# Altium PCB RPI 3.PcbDoc
Units mil, origin at the board's own origin, x right, y up, seen from the top; angles counter-clockwise.
Board outline 3139.76 x 2874.02 mil, 2 copper layers (Top Layer, Bottom Layer), stack 61.2 mil thick; 29 components, 46 nets, 139 pads, 1 vias.
Unrouted connection lines stored in the file: 63.
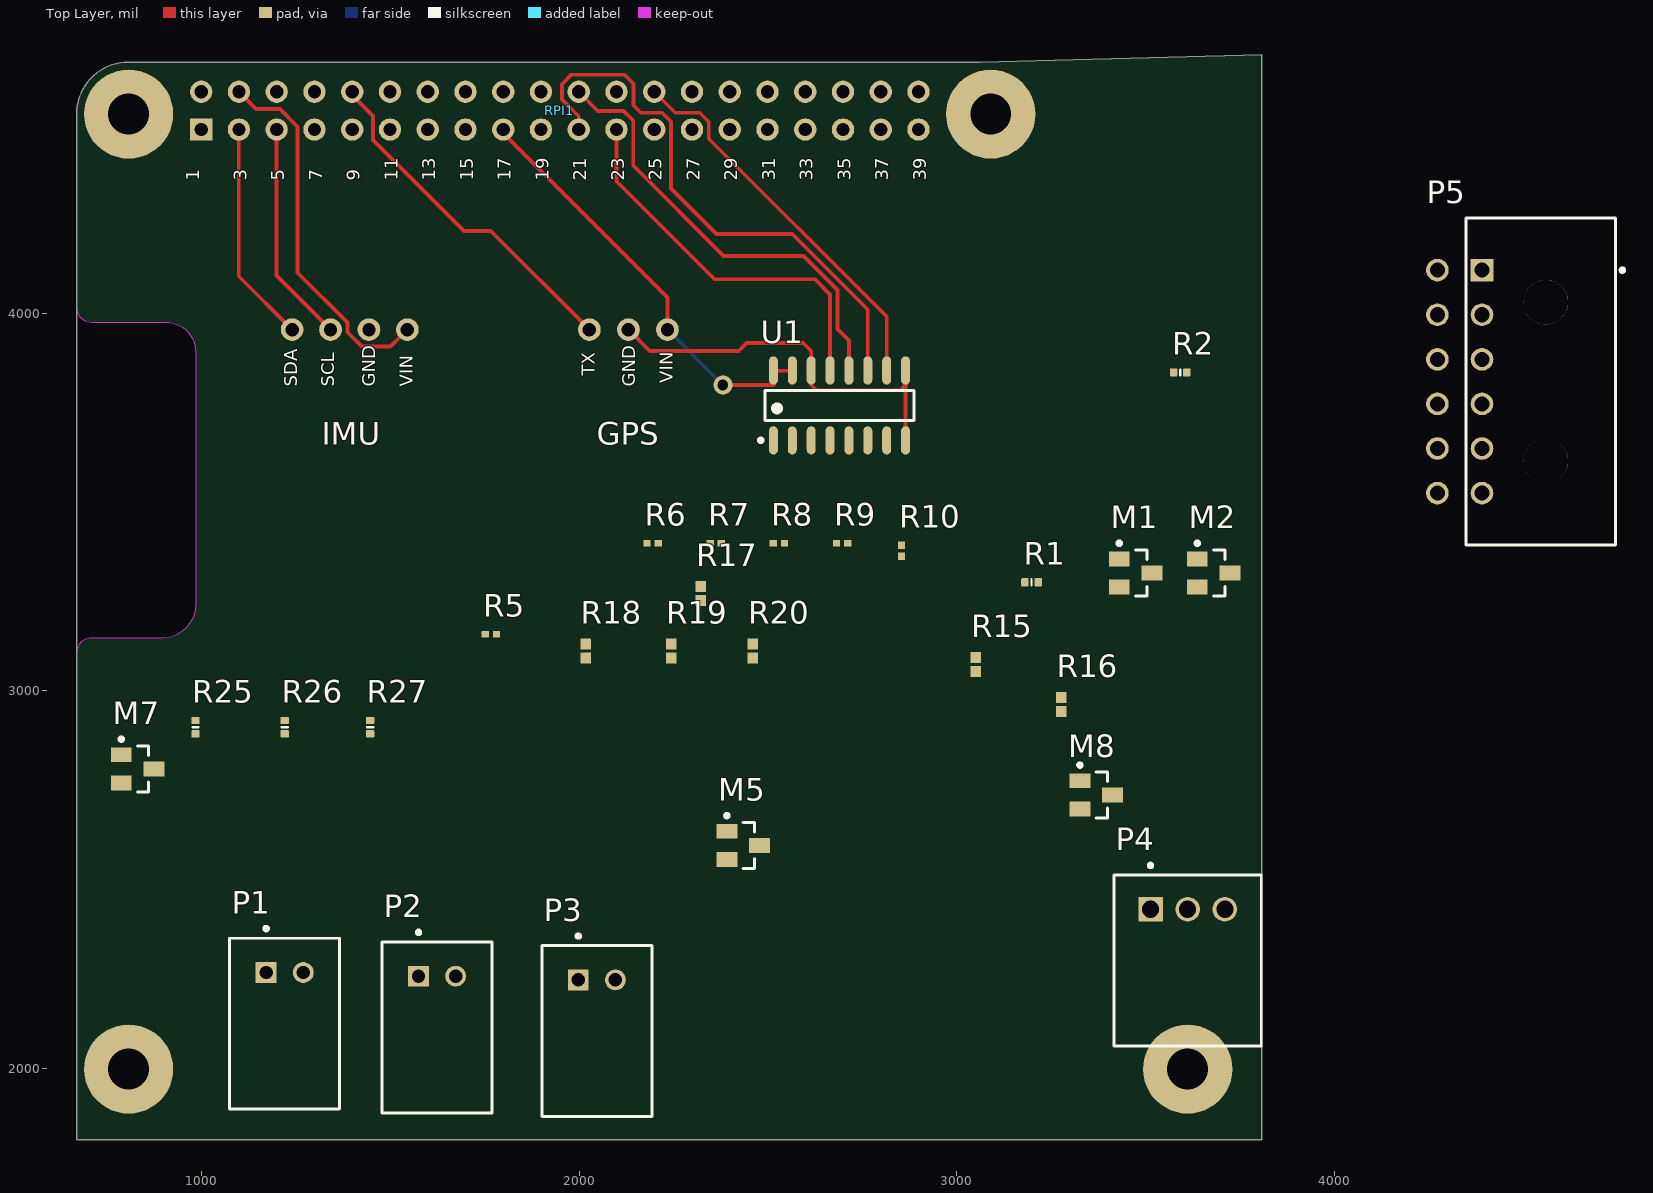
[diagram p0: Top Layer view]
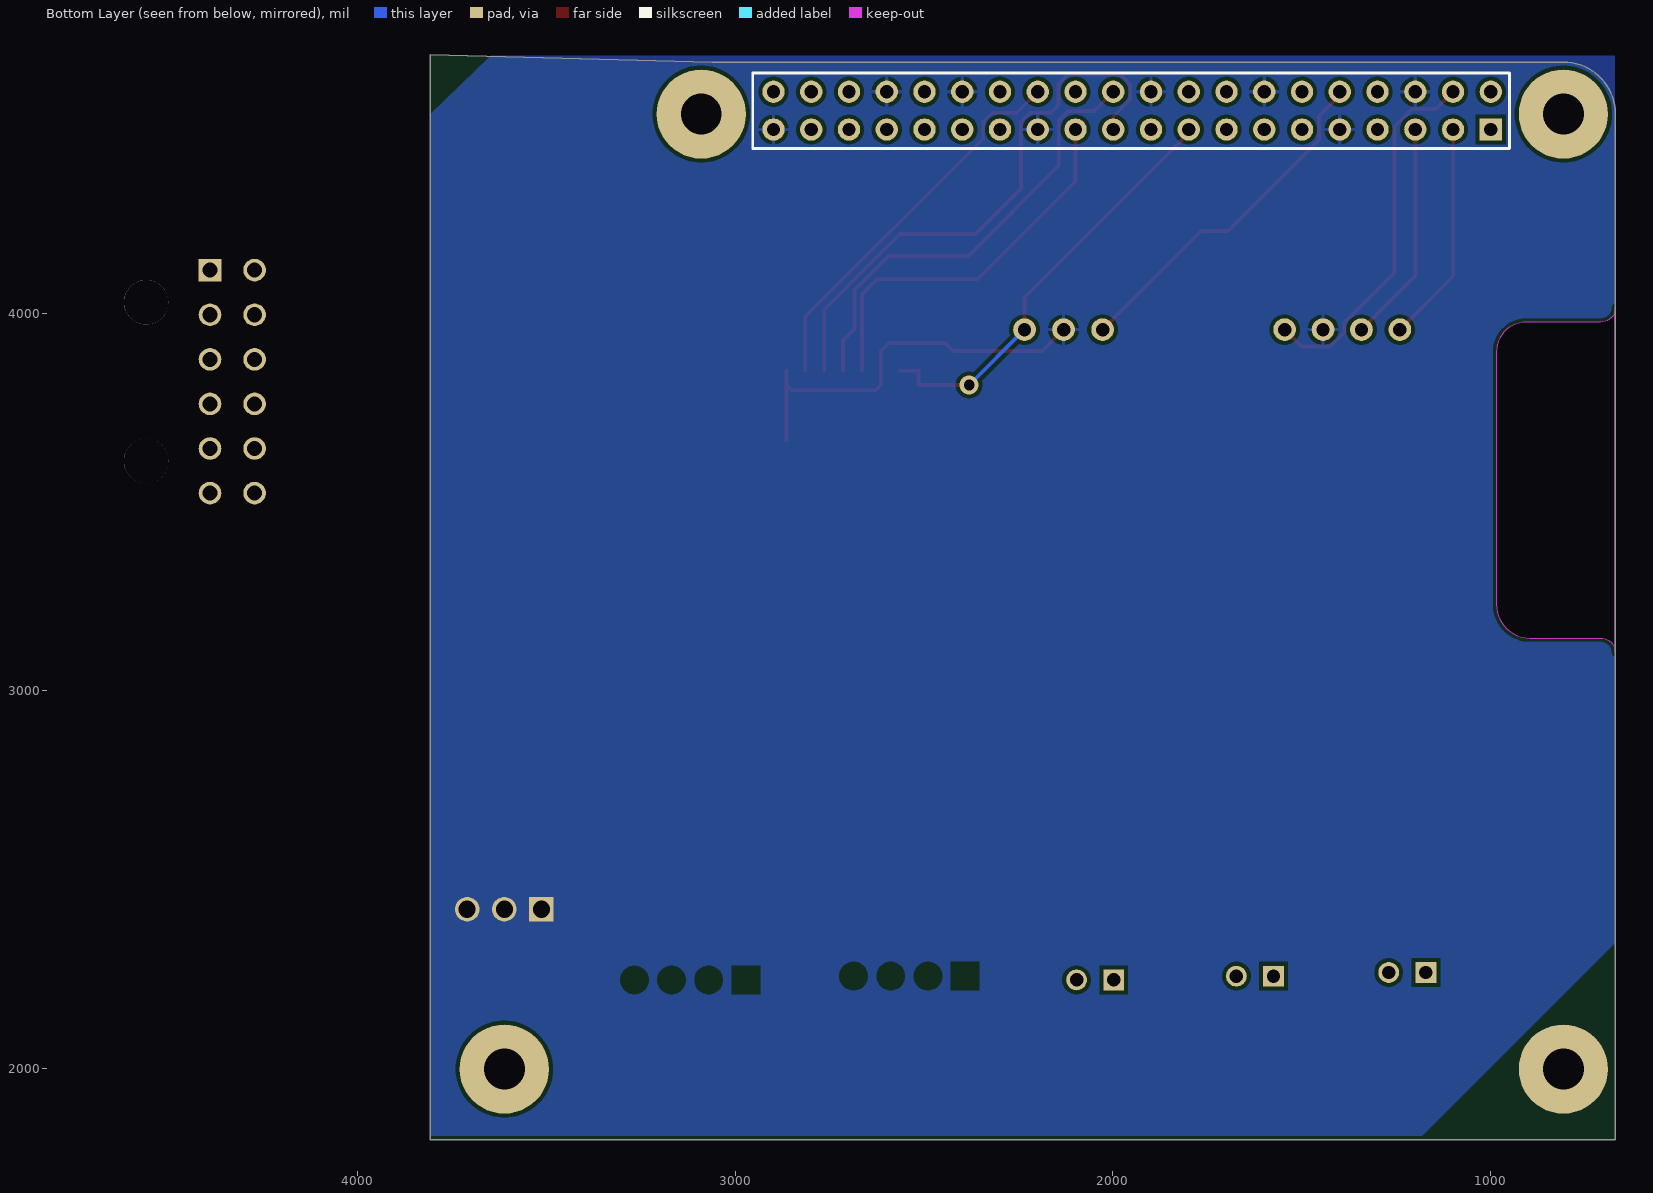
[diagram p1: Bottom Layer view, seen from below]

## Layer stack, top to bottom
Top Solder: solder mask 0.8, Solder Resist, Dk 3.5
Top Layer: signal copper 2.1
Dielectric 1: dielectric 57, FR-4, Dk 4.6
Bottom Layer: signal copper 2.1
Bottom Solder: solder mask 0.8, Solder Resist, Dk 3.5

## Board outline
3257.87,1811.02 3809.06,1811.02 3809.06,4685.04 3061.02,4665.35 807.09,4665.35 ccw(c807.08,4527.56) 669.29,4527.56 669.29,2598.43 ccw(c807.11,2598.42) 669.53,2590.33 669.29,2590.1 669.29,1811.02
cut-out: 669.29,3100.39 669.29,4015.75 ccw(c708.66,4015.75) 708.66,3976.38 905.51,3976.38 cw(c905.51,3897.64) 984.25,3897.64 984.25,3228.35 cw(c895.67,3228.34) 895.67,3139.76 708.66,3139.76 ccw(c708.66,3100.4)

## Design rules (kind name [scope] priority, off if disabled: settings)
Clearance [All] p1: gap=10 ignorepadtopadclearanceinfootprint=FALSE except(0: Arc-Hole Track-Hole SMDPad-Hole THPad-Hole Via-Hole Fill-Hole Poly-Hole Region-Hole Text-Hole)
PolygonConnect [All] p1: connectstyle=Relief reliefconductorwidth=10 reliefentries=4 polygonreliefangle="90 Angle" airgapwidth=10
RoutingVias [All] p1: holewidth=28 width=50 viastyle="Through Hole" minholewidth=28 minwidth=50 maxholewidth=28 maxwidth=50
SolderMaskExpansion [All] p1: expansion=4 istentingtop=FALSE
Width [All] p1: maxlimit=10 minlimit=10 preferedwidth=10
30 further rules are at their usual default settings.

## Components (designator, comment, footprint, x,y, rotation, side; value= is the part's Value field where it differs from the comment)
M1 "BSS138" FAIR-SOT23-3_V 3474.4,3312.01 r0 top
M2 "BSS138" FAIR-SOT23-3_V 3681.1,3312.01 r0 top
M5 "BSS138" FAIR-SOT23-3_V 2435.04,2590.55 r0 top
M7 "BSS138" FAIR-SOT23-3_V 830.71,2793.31 r0 top
M8 "BSS138" FAIR-SOT23-3_V 3370.08,2724.41 r0 top
P1 "S2B-XH-A(LF)(SN)" JST-S2B-XH-A(LF)(SN)_V 1220.47,2253.94 r0 top
P2 "S2B-XH-A(LF)(SN)" JST-S2B-XH-A(LF)(SN)_V 1624.01,2244.09 r0 top
P3 "S2B-XH-A(LF)(SN)" JST-S2B-XH-A(LF)(SN)_V 2047.24,2234.25 r0 top
P4 "S3B-XH-A(LF)(SN)" JST-S3B-XH-A(LF)(SN)_V 3612.2,2421.26 r0 top
P5 "66201221022" 66201221022 4547.24,3818.9 r90 top
R1 "Resistor 10K  +/-1 % 0402 63 mW" RESC0402(1005)_L 3198.82,3287.4 r0 top value=10k
R2 "Resistor 10K  +/-1 % 0402 63 mW" RESC0402(1005)_L 3592.51,3843.5 r0 top value=10k
R5 "RES" RESC1005X40X25LL05T10 1766.73,3149.61 r0 top
R6 "RES" RESC1005X40X25LL05T10 2194.88,3390.75 r0 top
R7 "RES" RESC1005X40X25LL05T10 2362.2,3390.75 r0 top
R8 "RES" RESC1005X40X25LL05T10 2529.52,3390.75 r0 top
R9 "RES" RESC1005X40X25LL05T10 2696.85,3390.75 r0 top
R10 "RES" RESC1005X40X25LL05T10 2854.33,3371.06 r90 top
R15 "RES-2" RESC1005X40X25ML10T10 3051.18,3069.88 r90 top value=33k
R16 "RES-2" RESC1005X40X25ML10T10 3277.56,2963.58 r90 top value=33k
R17 "RES-2" RESC1005X40X25ML10T10 2322.83,3257.87 r90 top value=33k
R18 "RES-2" RESC1005X40X25ML10T10 2017.72,3105.32 r90 top value=33k
R19 "RES-2" RESC1005X40X25ML10T10 2244.1,3105.32 r90 top value=33k
R20 "RES-2" RESC1005X40X25ML10T10 2460.63,3105.32 r90 top value=33k
R25 "Resistor 10K  +/-1 % 0402 63 mW" RESC0402(1005)_L 984.24,2903.54 r90 top value=10k
R26 "Resistor 10K  +/-1 % 0402 63 mW" RESC0402(1005)_L 1220.46,2903.54 r90 top value=10k
R27 "Resistor 10K  +/-1 % 0402 63 mW" RESC0402(1005)_L 1446.84,2903.54 r90 top value=10k
RPI1 "RPI GPIO Connector" RPI 1949.21,4536.61 r180 top
U1 "MCP3008-I/SL" SOIC-SL16_L 2689.96,3755.91 r90 top

## Footprints (in the part's own frame and the unit in brackets; to place one, negate y for a bottom-side part, rotate by r counter-clockwise, add the part's x,y. Pads: shape width x height; smd on the part's side, far side on the other; paste and mask are expansions set on the pad)
66201221022 [mm] "Dual row Right angle header With plastic peg 12p"
  rect 1.52x1.52 hole 1.02: 1(7.5,3.95)
  round 1.52 hole 1.02: 2(4.5,3.95) 3(1.5,3.95) 4(-1.5,3.95) 5(-4.5,3.95) 6(-7.5,3.95) 7(7.5,6.95) 8(4.5,6.95) 9(1.5,6.95) 10(-1.5,6.95) 11(-4.5,6.95) 12(-7.5,6.95)
  round 3 hole 3 unplated: MH1(-5.34,-0.35) MH2(5.34,-0.35)
  silkscreen extent -11,-5.62 11,5.02, body extent -10.85,-4.95 10.85,7.27, height 8.79
FAIR-SOT23-3_V [mm] "SOT23, 3-Leads, Body 3.12x1.5mm, Pitch 0.95mm"
  rect 1.4x1 smd: 1(-1.1,0.95) 2(-1.1,-0.95) 3(1.1,0)
  silkscreen extent -1.22,-1.55 0.75,2.12, body extent -1.35,-1.56 1.35,1.56, height 1.2
JST-S2B-XH-A(LF)(SN)_V [mm] "Header, 2-Leads, Body 7.4x11.5mm, Pitch 2.5mm"
  rect 1.4x1.4 hole 0.9: 1(-1.25,0)
  round 1.4 hole 0.9: 2(1.25,0)
  silkscreen extent -3.7,-9.2 3.7,3.08, body extent -3.7,-9.2 3.7,2.3, height 5.95
JST-S3B-XH-A(LF)(SN)_V [mm] "Header, 3-Leads, Body 9.9x11.5mm, Pitch 2.5mm"
  rect 1.65x1.65 hole 1.15: 1(-2.5,0)
  round 1.65 hole 1.15: 2(0,0) 3(2.5,0)
  silkscreen extent -4.95,-9.2 4.95,3.08, body extent -4.95,-9.2 4.95,2.3, height 6.15
RESC0402(1005)_L [mm] "Chip Resistor, Body 1.0x0.5mm, IPC High Density"
  rrect25% 0.5x0.55 smd: 1(-0.45,0) 2(0.45,0)
  silkscreen extent 0,-0.2 0,0.2, body extent -0.5,-0.25 0.5,0.25, height 0.3
RESC1005X40X25LL05T10 [mm] "Chip Resistor, 2-Leads, Body 1.00x0.50mm, IPC High Density"
  rect 0.5x0.45 smd: 1(-0.375,0) 2(0.375,0)
  body extent -0.53,-0.27 0.53,0.28, height 0.4
RESC1005X40X25ML10T10 [mm] "Chip Resistor, 2-Leads, Body 1.1x0.6mm, IPC Low Density"
  rect 0.75x0.7 smd: 1(-0.475,0) 2(0.475,0)
  body extent -0.55,-0.27 0.55,0.28, height 0.4
RPI [mm]
  rect 1.5x1.5 hole 0.9: 1(24.13,1.27)
  round 1.5 hole 0.9: 2(24.13,-1.27) 3(21.59,1.27) 4(21.59,-1.27) 5(19.05,1.27) 6(19.05,-1.27) 7(16.51,1.27) 8(16.51,-1.27) 9(13.97,1.27) 10(13.97,-1.27) 11(11.43,1.27) 12(11.43,-1.27) 13(8.89,1.27) 14(8.89,-1.27) 15(6.35,1.27) 16(6.35,-1.27) 17(3.81,1.27) 18(3.81,-1.27) 19(1.27,1.27) 20(1.27,-1.27) 21(-1.27,1.27) 22(-1.27,-1.27) 23(-3.81,1.27) 24(-3.81,-1.27) 25(-6.35,1.27) 26(-6.35,-1.27) 27(-8.89,1.27) 28(-8.89,-1.27) 29(-11.43,1.27) 30(-11.43,-1.27) 31(-13.97,1.27) 32(-13.97,-1.27) 33(-16.51,1.27) 34(-16.51,-1.27) 35(-19.05,1.27) 36(-19.05,-1.27) 37(-21.59,1.27) 38(-21.59,-1.27) 39(-24.13,1.27) 40(-24.13,-1.27)
  body extent -25.52,-2.63 25.53,2.38, height 8.5
SOIC-SL16_L [mm] "SOIC, 16-Leads, Body 9.9x3.9mm, Pitch 1.27mm, IPC High Density"
  oval 1.9x0.6 smd: 1(-2.35,4.445) 2(-2.35,3.175) 3(-2.35,1.905) 4(-2.35,0.635) 5(-2.35,-0.635) 6(-2.35,-1.905) 7(-2.35,-3.175) 8(-2.35,-4.445) 9(2.35,-4.445) 10(2.35,-3.175) 11(2.35,-1.905) 12(2.35,-0.635) 13(2.35,0.635) 14(2.35,1.905) 15(2.35,3.175) 16(2.35,4.445)
  silkscreen extent -2.47,-5 1,5.42, body extent -2,-5 2,5, height 1.75

## Part data
M1 M2 M5 M7 M8: library part CMP-013-00021-4, "N-Channel Logic Level Enhancement Mode Field Effect Transistor, 220 mA, 50 V, -55 to 150 degC, 3-Pin SOT-23, RoHS, Tape and Reel", Case/Package=TO-236-3, Input Capacitance=27pF, Manufacturer=Fairchild, Max Operating Temperature=150°C, Min Operating Temperature=-55°C, Nominal Dual Supply Voltage=50V, Package Description="3-Pin Small Outline Transistor, Body 2.92 x 1.325 mm, Pitch 0.95 mm", Package Quantity=1, Package Reference=SOT23-3, Package Version="Rev. 12, 03/2016", Power=360mW, Resistance=0.7Ohm, Datasheet URL=https://www.fairchildsemi.com/datasheets/BS/BSS138.pdf, Datasheet Version="Rev. C, 10/2005", Elements=1, Mounting Technology=SM, Nominal Vgs=1.3V, Packaging=TapeandReel, Pins=3, Rds On Max=3.5Ohm, RoHS Compliant=True, Typical Rise Time=9ns
P1 P2 P3: library part CMP-002-00032-2, "Male Header, Pitch 2.5 mm, 1 x 2 Position, Height 6.1 mm, Tail Length 3.4 mm, -25 to 85 degC, RoHS, Bulk", Manufacturer=JST, Max Operating Temperature=85°C, Min Operating Temperature=-25°C, Package Description="XH Series Disconnectable Crimp Style Connector, Pitch 2.5 mm, 1 x 2 Position, Height 6.1 mm, Tail Length 3.4 mm", Case/Package=S2B-XH-A(LF)(SN), Connector Type=Header, Datasheet URL=http://www.jst-mfg.com/product/pdf/eng/eXH.pdf, Datasheet Version=May-16, Gender=Male, Manufacturer URL=http://www.jst.com/home2.html, Mounting Technology=TH, Package Reference=S2B-XH-A(LF)(SN), RoHS Compliant=Unknown
P4: library part CMP-002-00033-2, "Male Header, Pitch 2.5 mm, 1 x 3 Position, Height 6.1 mm, Tail Length 3.4 mm, -25 to 85 degC, RoHS, Bulk", Manufacturer=JST, Max Operating Temperature=85°C, Min Operating Temperature=-25°C, Package Description="Male Header, Pitch 2.5 mm, 1 x 3 Position, Height 6.1 mm, Tail Length 3.4 mm", Case/Package=S3B-XH-A(LF)(SN), Connector Type=Header, Datasheet URL=http://www.jst-mfg.com/product/pdf/eng/eXH.pdf, Datasheet Version=May-16, Gender=Male, Manufacturer URL=http://www.jst.com/home2.html, Mounting Technology=TH, Package Reference=S3B-XH-A(LF)(SN), RoHS Compliant=Unknown
P5: library part CMP-002-00072-1, "THT Male Header WR-MPC3, with Snap-in Plastic Pegs, Right Angled, Dual Row, pitch 3 mm, 12 pins"
R1 R2 R25 R26 R27: library part CMP-009-00149-3, "Chip Resistor, 10 kOhms, +/-1 %, 63 mW, -55 to 125 degC, 0402", Case/Package=0402, Max Operating Temperature=155°C, Min Operating Temperature=-55°C, Power=63mW, Tolerance=1%, Pins=2
R5 R6 R7 R8 R9 R10: library part CMP-009-00177-1, "Res General Purpose Thick Film 0402 18k Ohm 5% 1/16W ±100ppm/°C Molded Paper T/R"
R15 R16 R17 R18 R19 R20: library part CMP-009-00028-5, "Chip Resistor, 33 KOhm, +/- 5%, 0.063 W, -55 to 155 degC, 0402 (1005 Metric)", Case/Package=0402, Max Operating Temperature=155°C, Min Operating Temperature=-55°C, Power=63mW, Tolerance=5%, Mounting Technology=SM, Pins=2, RoHS Compliant=True
RPI1: library part "rpi connector", "GPIO Header for Raspberry Pi A+/B+/Pi 2/Pi 3 - 2x20", Manufacturer="SparkFun Electronics", Manufacturer Part Number=PRT-14017, Supplier Part Number 1=1568-1462-ND, Accessory Type=Connector, Category="Development Boards, Kits, Programmers", ComponentLink1Description=https://cdn.sparkfun.com/datasheets/Dev/RaspberryPi/12313.pdf, ComponentLink1URL=https://cdn.sparkfun.com/datasheets/Dev/RaspberryPi/12313.pdf, For Use With/Related Products="Raspberry Pi", Nils Minor=author, nilsminor@web.de=mail, Part Status=Active, Pricing 1="1=1.84 (EUR)", RoHS="RoHS Compliant", Stock 1=150, Supplier 1=Digi-Key
U1: library part CMP-0188-00041-2, "2.7V 4-Channel/8-Channel 10-Bit A/D Converters with SPI Serial Interface, 16-Pin SOIC 150mil, Industrial Temperature", Code_IPC=SOIC127P600-16, Code_JEDEC=MS-012-AC, ComponentLink1Description="Manufacturer URL", ComponentLink1URL=http://www.microchip.com/, ComponentLink2Description=Datasheet, ComponentLink2URL=http://ww1.microchip.com/downloads/en/DeviceDoc/21295d.pdf, ComponentLink3Description="Package Specification", ComponentLink3URL=http://www.microchip.com/stellent/groups/techpub_sg/documents/packagingspec/en012702.pdf, DatasheetVersion="revD, Dec-2008", PackageDescription="16-Lead Plastic Small Outline (SL) - Narrow, 3.90mm Body [SOIC]", PackageReference=SOIC-SL16, PackageVersion="revBB, Aug-2009", RevisionNote="URLs added."

## Free pads (board coordinates)
  round 60 hole 35.43: 20(1341.86,3956.69) 21(1240.16,3956.69) 21(1443.57,3956.69) 22(1545.28,3956.69) 24(2027.56,3956.69) 25(2130.91,3956.69) 26(2234.25,3956.69)
  round 236.22 hole 108.27: ""(807.09,1998.03) ""(807.09,4527.56) ""(3090.55,4527.56) ""(3612.2,1998.03)

## Via types
v1: diameter 50, hole 28, Top Layer to Bottom Layer, 1 vias

## Nets (pads, with @x,y where several pads share a name; then routed paths per layer and width w, separated by ;. In a path a pad name is that pad's centre, name@x,y a point inside that pad or via, vN(x,y) a via of type N, cw(c..) or ccw(c..) an arc to the next point about the centre after c; other vN are vias at no path point)
+3V3: P5.3 P5.9 pad.26 RPI1.1 RPI1.17 U1.15 U1.16 | length 1135.6
  Top Layer w10: RPI1.17@1798.82,4477.56 2234.25,4042.13 2234.25,3966.54 pad.26@2224.41,3956.69 ; v1(2380.95,3810) 2514.96,3810 U1.16@2514.96,3848 ; U1.16 U1.16@2514.96,3848 ; U1.15 2564.96,3848 U1.16@2514.96,3848
  Bottom Layer w10: pad.26 v1(2380.95,3810)
+5V: P5.4 P5.10 pad.22 RPI1.2 RPI1.4 | length 990.2
  Top Layer w10: RPI1.4 1144.68,4541.14 1207.66,4541.14 1254.69,4494.11 1254.69,4107.51 1386.86,3975.33 1386.86,3949.76 1424.93,3911.69 1500.28,3911.69 1528.94,3940.36 1528.94,3963.18 pad.22@1525.59,3966.54
GND: M1.2 M2.2 M5.2 M7.2 M8.2 pad.21@1443.57,3956.69 pad.25 R1.2 R2.2 R15.1 R16.1 R17.1 R18.1 R19.1 R20.1 R25.2 R26.2 R27.2 RPI1.6 RPI1.9 RPI1.14 RPI1.20 RPI1.25 RPI1.30 RPI1.34 RPI1.39 U1.7 U1.8 U1.9 U1.14 | length 1067.7
  Top Layer w10: RPI1.6@1200.79,4575.59 RPI1.6@1200.79,4576.77 ; pad.25@2135.83,3956.69 pad.25 2187.6,3900 2423,3900 2444,3921 2593.96,3921 2614.96,3900 U1.14 2614.96,3810 2628.96,3796 2850.96,3796 2864.96,3810 ; U1.8 2864.96,3810 ; U1.9 2864.96,3810
NetM1_1: M1.1 R1.1 RPI1.33
NetM1_3: M1.3 P5.5
NetM2_1: M2.1 R2.1 RPI1.32
NetM2_3: M2.3 P5.11
NetM5_1: M5.1 R25.1 RPI1.11
NetM5_3: M5.3 P4.1
NetM7_1: M7.1 R26.1 RPI1.13
NetM7_3: M7.3 P4.2
NetM8_1: M8.1 R27.1 RPI1.15
NetM8_3: M8.3 P4.3
NetP1_1: P1.1 R5.2
NetP1_2: P1.2 R6.2
NetP2_1: P2.1 R7.2
NetP2_2: P2.2 R8.2
NetP3_1: P3.1 R9.2
NetP3_2: P3.2 R10.2
NetP5_1: P5.1 RPI1.29
NetP5_2: P5.2 RPI1.31
NetP5_7: P5.7 RPI1.16
NetP5_8: P5.8 RPI1.18
NetR5_1: R5.1 R15.2 U1.1
NetR6_1: R6.1 R16.2 U1.2
NetR7_1: R7.1 R17.2 U1.3
NetR8_1: R8.1 R18.2 U1.4
NetR9_1: R9.1 R19.2 U1.5
NetR10_1: R10.1 R20.2 U1.6
NetRPI1_3: pad.21@1240.16,3956.69 RPI1.3 | length 581.7
  Top Layer w10: RPI1.3@1102.36,4478.35 1098.82,4474.8 1098.82,4098.03 pad.21@1240.16,3956.69
NetRPI1_5: pad.20 RPI1.5 | length 581.7
  Top Layer w10: RPI1.5@1200.79,4478.35 1198.82,4476.38 1198.82,4099.74 pad.20
NetRPI1_7: RPI1.7
NetRPI1_8: RPI1.8
NetRPI1_10: pad.24 RPI1.10 | length 923.7
  Top Layer w10: RPI1.10@1397.64,4576.77 1399.61,4576.77 1454.29,4522.09 1454.29,4459.12 1695.25,4218.16 1766.09,4218.16 pad.24
NetRPI1_12: RPI1.12
NetRPI1_19: RPI1.19 U1.11
NetRPI1_21: RPI1.21 U1.12 | length 1515.7
  Top Layer w10: RPI1.21 1999.21,4521.79 1954.68,4566.32 1954.68,4606.68 1980,4632 2120,4632 2144,4608 2144,4550.88 2163.74,4531.14 2220,4531.14 2243.74,4507.4 2243.74,4330.26 2364,4210 2565,4210 2764.96,4010.04 2764.96,3848.43
NetRPI1_22: RPI1.22 U1.10 | length 1198.6
  Top Layer w10: RPI1.22 2049.83,4536 2118,4536 2143.74,4510.26 2143.74,4391.26 2383,4152 2594.71,4152 2685,4061.71 2685,3957.96 2714.96,3928 2714.96,3848.43
NetRPI1_23: RPI1.23 U1.13 | length 1028.3
  Top Layer w10: RPI1.23 2099.21,4349.79 2359,4090 2624.96,4090 2664.96,4050 U1.13
NetRPI1_24: RPI1.24
NetRPI1_26: RPI1.26 | length 1031.5
  Top Layer w10: RPI1.26 2254.68,4531.14 2320,4531.14 2343.74,4507.4 2343.74,4462.22 2814.96,3991 2814.96,3848.43
NetRPI1_35: RPI1.35
NetRPI1_36: RPI1.36
NetRPI1_37: RPI1.37
NetRPI1_38: RPI1.38
NetRPI1_40: RPI1.40
pads on no net: P5.6 P5.12 P5.MH1 P5.MH2 RPI1.27 RPI1.28

## Polygon pours and split planes (outlines as drawn)
GND on Bottom Layer "Bottom Ground" (solid, pour order 0): 3809.06,4527.56 3647.81,4682.09 670.27,4682.09 670.27,2331.7 1181.1,1820.87 3808.95,1820.87

## Silkscreen, mask and mechanical layers (free items; w line width, h text height)
Top Overlay:
  text "1" at 994.69,4351.18 h35 r90
  text "3" at 1119.69,4351.18 h35 r90
  text "5" at 1219.69,4351.18 h35 r90
  text "7" at 1319.69,4351.18 h35 r90
  text "9" at 1419.69,4351.18 h35 r90
  text "11" at 1519.69,4351.18 h35 r90
  text "13" at 1619.69,4351.18 h35 r90
  text "15" at 1719.69,4351.18 h35 r90
  text "17" at 1819.69,4351.18 h35 r90
  text "19" at 1919.69,4351.18 h35 r90
  text "21" at 2019.69,4351.18 h35 r90
  text "23" at 2119.69,4351.18 h35 r90
  text "25" at 2219.69,4351.18 h35 r90
  text "27" at 2319.69,4351.18 h35 r90
  text "29" at 2419.69,4351.18 h35 r90
  text "31" at 2519.69,4351.18 h35 r90
  text "33" at 2619.69,4351.18 h35 r90
  text "35" at 2719.69,4351.18 h35 r90
  text "37" at 2819.69,4351.18 h35 r90
  text "39" at 2919.69,4351.18 h35 r90
  text "TX" at 2041.24,3834.74 h35 r90
  text "VIN" at 2247.94,3815.06 h35 r90
  text "SDA" at 1253.84,3805.21 h35 r90
  text "SCL" at 1352.27,3805.21 h35 r90
  text "GND" at 1460.54,3805.21 h35 r90
  text "VIN" at 1558.96,3805.21 h35 r90
  text "GND" at 2149.51,3805.21 h35 r90
  text "IMU" at 1319.06,3651.73 h60
  text "GPS" at 2047.4,3651.73 h60
M2: Outline:
  lines w10: 659.45,1958.66 ccw(c797.24,1958.66) 797.24,1820.87 3080.71,1820.87 ccw(c3080.55,1958.5) 3218.19,1958.66 ; 669.29,2588.58 669.29,4517.72 ; 669.29,4527.56 cw(c807.09,4527.56) 807.09,4665.35 3090.55,4665.35 ; 3090.55,4655.51 cw(c3090.39,4517.87) 3228.03,4517.72 3228.03,2588.58